# Altium PCB C3.0-控制传感-3.0-led灯控制模块-24.10.16.PcbDoc
Units mm, origin at the board's own origin, x right, y up, seen from the top; angles counter-clockwise.
Board outline 15 x 17 mm, 2 copper layers (Top Layer, Bottom Layer); 6 components, 6 nets, 15 pads, 0 vias.
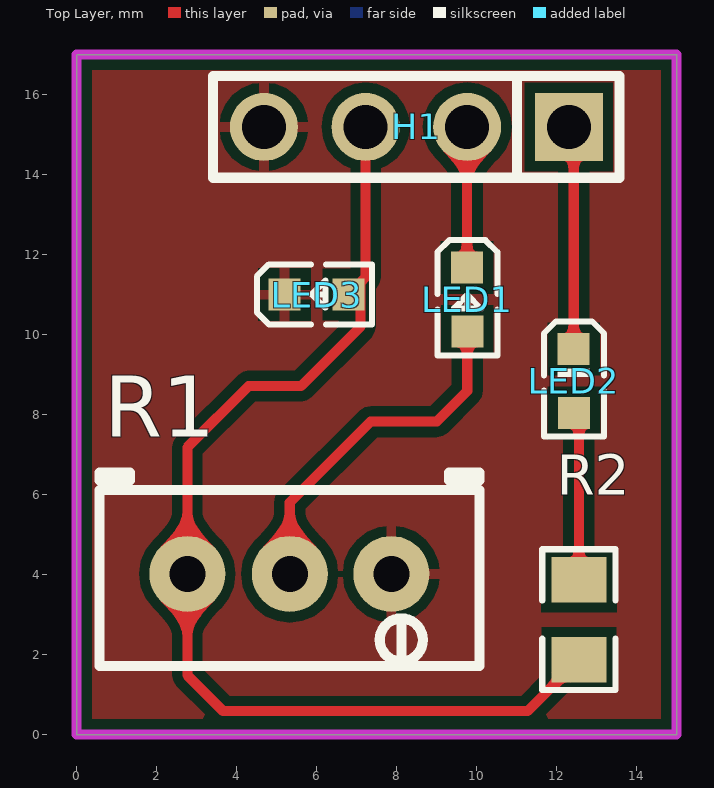
[diagram p0: Top Layer view]
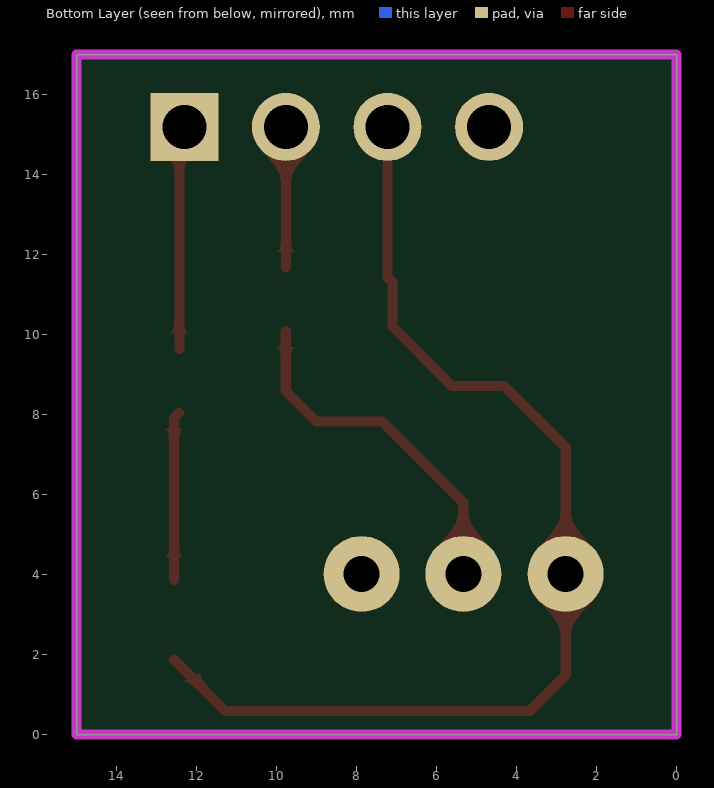
[diagram p1: Bottom Layer view, seen from below]

## Layer stack, top to bottom
Top Solder: solder mask 0.0102, Solder Resist, Dk 3.5
Top Layer: signal copper 0.0356
Dielectric 1: dielectric 0.32, FR-4, Dk 4.8
Bottom Layer: signal copper 0.0356
Bottom Solder: solder mask 0.0102, Solder Resist, Dk 3.5

## Board outline
0,0 15,0 15,17 0,17

## Design rules (kind name [scope] priority, off if disabled: settings)
Clearance [All] p1: gap=0.254
PolygonConnect [All] p1: connectstyle=Relief reliefconductorwidth=0.254 reliefentries=4 polygonreliefangle="90 Angle" airgapwidth=0.254
RoutingVias [All] p1: holewidth=0.711 width=1.27 viastyle="Through Hole" minholewidth=0.711 minwidth=1.27 maxholewidth=0.711 maxwidth=1.27
SolderMaskExpansion [All] p1: expansion=0.102
Width [All] p1: maxlimit=0.254 minlimit=0.254 preferedwidth=0.254
30 further rules are at their usual default settings.

## Components (designator, comment, footprint, x,y, rotation, side; value= is the part's Value field where it differs from the comment)
H1 "PZ254V-11-04P" HDR-TH_4P-P2.54-V-M 8.496,15.19 r180 top
LED1 "XL-1608UBC-04" LED0603-RD_BLUE 9.766,10.872 r270 top
LED2 "XL-1608UGC-04" LED0603-RD_GREEN 12.433,8.84 r270 top
LED3 "XL-1608WWC-06" LED0603-RD_WHITE 6,11 r0 top
R1 "100kΩ" RES-ADJ-TH_3P-L9.5-W4.9-P2.50-L_3296W 5.321,4.014 r180 top
R2 "100Ω" R0805 12.56,2.871 r270 top

## Footprints (in the part's own frame and the unit in brackets; to place one, negate y for a bottom-side part, rotate by r counter-clockwise, add the part's x,y. Pads: shape width x height; smd on the part's side, far side on the other; paste and mask are expansions set on the pad)
HDR-TH_4P-P2.54-V-M [mm]
  rect 1.7x1.7 hole 1.1: 1(-3.81,0)
  round 1.7 hole 1.1: 2(-1.27,0) 3(1.27,0) 4(3.81,0)
  silkscreen extent -5.08,-1.27 5.08,1.27
LED0603-RD_BLUE [mm]
  rect 0.8x0.8 smd: 1(-0.8,-0.004) 2(0.799,0.004)
  silkscreen extent -1.49,-0.75 1.39,0.76
LED0603-RD_GREEN [mm]
  rect 0.8x0.8 smd: 1(-0.799,-0.003) 2(0.799,0.003)
  silkscreen extent -1.49,-0.75 1.39,0.76
LED0603-RD_WHITE [mm]
  rect 0.8x0.8 smd: 1(-0.799,-0.003) 2(0.799,0.003)
  silkscreen extent -1.49,-0.75 1.39,0.76
R0805 [mm]
  rect 1.133x1.377 smd paste-100 mask+0.051: 1(-1,0) 2(1,0)
  silkscreen extent -1.76,-0.92 1.76,0.92
RES-ADJ-TH_3P-L9.5-W4.9-P2.50-L_3296W [mm]
  round 1.9 hole 0.9: 1(-2.55,0) 2(-0.01,0) 3(2.55,0)
  silkscreen extent -4.75,-2.54 4.75,2.3

## Part data
R1: library part 3296W-1-104
R2: library part 0805W8F1000T5E

## Nets (pads, with @x,y where several pads share a name; then routed paths per layer and width w, separated by ;. In a path a pad name is that pad's centre, name@x,y a point inside that pad or via, vN(x,y) a via of type N, cw(c..) or ccw(c..) an arc to the next point about the centre after c; other vN are vias at no path point)
GND: H1.4 LED3.1 R1.1
LED: H1.1 LED2.1 | length 5.6
  Top Layer w0.254: H1.1 12.43,15.066 LED2.1
NetLED1_2: LED1.2 R1.2 | length 8.9
  Top Layer w0.254: R1.2 5.331,5.802 7.353,7.824 9.004,7.824 9.77,8.59 LED1.2
NetLED2_2: LED2.2 R2.1 | length 4.2
  Top Layer w0.254: LED2.2 12.56,7.917 R2.1
R-ADC: H1.2 LED1.1 | length 3.5
  Top Layer w0.254: LED1.1 9.762,15.186 H1.2
VCC: H1.3 LED3.2 R1.3 R2.2 | length 27
  Top Layer w0.254: H1.3 7.226,11.43 7.102,11.306 7.102,10.2 5.616,8.713 4.305,8.713 2.771,7.179 R1.3 2.771,1.484 3.67,0.585 11.274,0.585 R2.2

## Polygon pours and split planes (outlines as drawn)
GND on Top Layer "TOP Layer-GND" (solid, remove dead copper, pour order 0): 0,17 0,0 15,0 15,17 0,17

## Keep-outs
Keep-Out Layer:
  the board outline again, w0.254